# EAGLE board breakout-ledpca9956b (EAGLE 9.3.2)
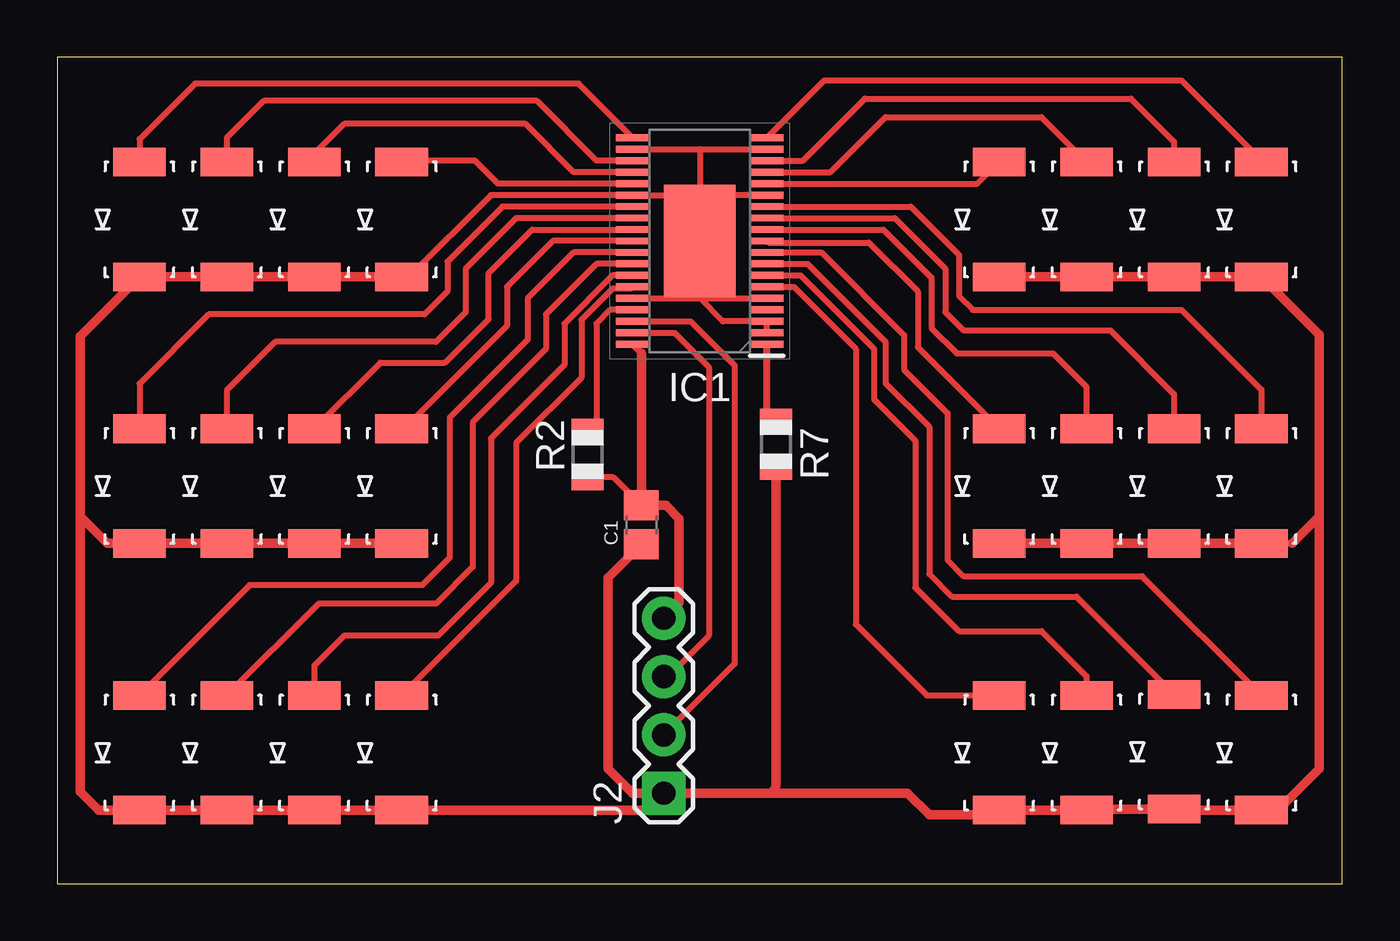
[diagram p0: board, top side]

Size 56 x 36 mm. Coordinates in mm from the lower left corner, seen from the top.
Outline: 0,0 56,0 56,36 0,36 0,0
Copper layers (1*16): Top 0.035mm / dielectric 1.5mm / Bottom 0.035mm
Design rules "OthermillDRC_30_deg_v2": minimum track width 6mil, minimum drill 0.8mm, track to track 6mil, track to pad 6mil, pad to pad 6mil, via to via 6mil, smd to smd 0mil, copper to edge 0mil, drill to drill 6mil, minimum pad ring 10mil, minimum via ring 10mil, stop-mask expansion 1mil, vias tented up to drill 30mil, thermal gap 6mil

## Footprints (pad centres in the part's own frame; a part is rotated, then mirrored left to right if it is on the bottom)
C0805 = smd 1.3 x 1.5: 1 -0.85,0; 2 0.85,0
SOP50P640X110-39N = smd 1.45 x 0.3: 1 -2.925,4.5; 2 -2.925,4; 3 -2.925,3.5; 4 -2.925,3; 5 -2.925,2.5; 6 -2.925,2; 7 -2.925,1.5; 8 -2.925,1; 9 -2.925,0.5; 10 -2.925,0; 11 -2.925,-0.5; 12 -2.925,-1; 13 -2.925,-1.5; 14 -2.925,-2; 15 -2.925,-2.5; 16 -2.925,-3; 17 -2.925,-3.5; 18 -2.925,-4; 19 -2.925,-4.5; 20 2.925,-4.5; 21 2.925,-4; 22 2.925,-3.5; 23 2.925,-3; 24 2.925,-2.5; 25 2.925,-2; 26 2.925,-1.5; 27 2.925,-1; 28 2.925,-0.5; 29 2.925,0; 30 2.925,0.5; 31 2.925,1; 32 2.925,1.5; 33 2.925,2; 34 2.925,2.5; 35 2.925,3; 36 2.925,3.5; 37 2.925,4; 38 2.925,4.5 | smd 3.1 x 4.9: 39 0,0
1X04 = drill 1.016 pad 1.88 square: 1 0,0 | drill 1.016 pad 1.88: 2 2.54,0; 3 5.08,0; 4 7.62,0
GULLWING_LED = smd 1.245 x 2.3: A 5,-1.5; C 0,-1.5
R0805 = smd 1.1 x 1.4: 1 -1,0; 2 1,0

## Placement (x,y rotation side)
C1  0.1 uF  [C0805]  25.46,15.63 90 top
IC1  PCA9956BTWY  [SOP50P640X110-39N]  28,28 180 top
J2  [1X04]  26.43,3.94 90 top
LED1  [GULLWING_LED]  39.55,3.2 90 top
LED2  [GULLWING_LED]  43.36,3.2 90 top
LED3  [GULLWING_LED]  47.17,3.25 90 top
LED4  [GULLWING_LED]  50.98,3.2 90 top
LED5  [GULLWING_LED]  39.55,14.82 90 top
LED6  [GULLWING_LED]  43.36,14.82 90 top
LED7  [GULLWING_LED]  47.17,14.82 90 top
LED8  [GULLWING_LED]  50.98,14.82 90 top
LED9  [GULLWING_LED]  39.55,26.44 90 top
LED10  [GULLWING_LED]  43.36,26.44 90 top
LED11  [GULLWING_LED]  47.17,26.44 90 top
LED12  [GULLWING_LED]  50.98,26.44 90 top
LED13  [GULLWING_LED]  2.08,26.44 90 top
LED14  [GULLWING_LED]  5.89,26.44 90 top
LED15  [GULLWING_LED]  9.7,26.44 90 top
LED16  [GULLWING_LED]  13.51,26.44 90 top
LED17  [GULLWING_LED]  2.08,14.82 90 top
LED18  [GULLWING_LED]  5.89,14.82 90 top
LED19  [GULLWING_LED]  9.7,14.82 90 top
LED20  [GULLWING_LED]  13.51,14.82 90 top
LED21  [GULLWING_LED]  2.08,3.2 90 top
LED22  [GULLWING_LED]  5.89,3.2 90 top
LED23  [GULLWING_LED]  9.7,3.2 90 top
LED24  [GULLWING_LED]  13.51,3.2 90 top
R2  10 K  [R0805]  23.11,18.7 90 top
R7  2 K  [R0805]  31.32,19.14 270 top
U$2  CMD_C0DE_LOGO  [CMD_C0DE_LOGO]  -27.75,3.81 0 top  (outside the outline)

## Library data of the parts
C1 = passives
IC1 = PCA9956BTWY; DESCRIPTION: NXP - PCA9956BTWY - LED DRIVER, CONSTANT CURRENT, HTSSOP-38; HEIGHT: 1.1mm; MANUFACTURER_NAME: NXP; MANUFACTURER_PART_NUMBER: PCA9956BTWY; MOUSER_PART_NUMBER: 771-PCA9956BTWY
J2 = connector; PROD_ID: CONN-09696
LED1-LED24 = leds
R2 R7 = darknet_parts_library
U$2 = logos

## Nets
GND: C1.1 IC1.2 IC1.3 IC1.5 IC1.14 IC1.18 IC1.21 IC1.25 IC1.34 IC1.39 J2.1 LED1.C LED2.C LED3.C LED4.C LED5.C LED6.C LED7.C LED8.C LED9.C LED10.C LED11.C LED12.C LED13.C LED14.C LED15.C LED16.C LED17.C LED18.C LED19.C LED20.C LED21.C LED22.C LED23.C LED24.C R7.2
N$1: IC1.6 LED1.A
N$2: IC1.7 LED2.A
N$3: IC1.8 LED3.A
N$4: IC1.9 LED4.A
N$5: IC1.10 LED5.A
N$6: IC1.11 LED6.A
N$7: IC1.12 LED7.A
N$8: IC1.13 LED8.A
N$9: IC1.15 LED9.A
N$10: IC1.16 LED10.A
N$11: IC1.17 LED11.A
N$12: IC1.19 LED12.A
N$13: IC1.20 LED13.A
N$14: IC1.22 LED14.A
N$15: IC1.23 LED15.A
N$16: IC1.24 LED16.A
N$17: IC1.26 LED17.A
N$18: IC1.27 LED18.A
N$19: IC1.28 LED19.A
N$20: IC1.29 LED20.A
N$21: IC1.30 LED21.A
N$22: IC1.31 LED22.A
N$23: IC1.32 LED23.A
N$24: IC1.33 LED24.A
N$35: IC1.1 R7.1
N$36: IC1.35 R2.2
SCL: IC1.36 J2.2
SDA: IC1.37 J2.3
VCC: C1.2 IC1.38 J2.4 R2.1

## Tracks (layer width: path | path; a pad name or v marks a point on that pad's centre or on a via)
GND
  Top 0.254: IC1.21 28,32 | 28,32 IC1.18 | 28,32 28,30 | 28,30 IC1.39 28,25.5 | 28,30 IC1.25 18.9,30 15.34,26.44 LED16.C | IC1.14 28,30 | IC1.34 28,25.5 | 28,25.5 IC1.5 | IC1.2 IC1.3 29,24.5 28,25.5 | 53.82,14.82 LED8.C | 53.2,3.2 LED4.C | 48.72,3.2 LED3.C | 44.91,3.25 LED2.C | 40.85,3 LED1.C | 31.32,4.26 31,3.94
  Top 0.406: LED16.C LED15.C LED14.C LED13.C 1,23.86 1,16 | 1,16 2.18,14.82 LED17.C LED18.C LED19.C LED20.C | 1,16 1,4 1.8,3.2 LED21.C LED22.C LED23.C LED24.C 25.69,3.2 J2.1 | C1.1 24,13.32 24,5 25.06,3.94 J2.1 | LED9.C LED10.C LED11.C LED12.C 55,23.92 55,16 | 55,16 53.82,14.82 | LED8.C LED7.C LED6.C LED5.C | 55,16 55,5 53.2,3.2 | LED4.C 48.72,3.2 | LED3.C 44.91,3.25 | LED2.C LED1.C | J2.1 31,3.94 37.06,3.94 38,3 40.85,3 | R7.2 31.32,4.26
N$1
  Top 0.254: IC1.6 32.1,26 34.8,23.3 34.8,11.3 37.9,8.2 LED1.A
N$2
  Top 0.254: IC1.7 32.4,26.5 35.6,23.3 35.6,21.1 37.4,19.3 37.4,12.9 39.3,11 42.9,11 44.86,9.04 LED2.A
N$3
  Top 0.254: IC1.8 32.7,27 36.1,23.6 36.1,21.8 38,19.9 38,13.5 39,12.5 44.42,12.5 LED3.A
N$4
  Top 0.254: IC1.9 33.3,27.5 36.9,23.9 36.9,22.4 38.8,20.5 38.8,14.1 39.5,13.4 47.28,13.4 LED4.A
N$5
  Top 0.254: IC1.10 31,27.93 35.37,27.93 37.5,25.8 37.5,23.37 LED5.A
N$6
  Top 0.254: IC1.11 36,28.5 38.1,26.4 38.1,24.2 39.2,23.1 43.4,23.1 44.86,21.64 LED6.A
N$7
  Top 0.254: IC1.12 36.5,29 38.7,26.8 38.7,24.9 39.5,24.1 45.9,24.1 48.67,21.33 LED7.A
N$8
  Top 0.254: IC1.13 37.2,29.5 39.3,27.4 39.3,25.6 39.9,25 49,25 52.48,21.52 LED8.A
N$9
  Top 0.254: IC1.15 40.11,30.5 LED9.A
N$10
  Top 0.254: IC1.16 33.7,31 36.1,33.4 42.9,33.4 LED10.A
N$11
  Top 0.254: IC1.17 32.5,31.5 35.2,34.2 46.8,34.2 48.67,32.33 LED11.A
N$12
  Top 0.254: IC1.19 33.42,35 49,35 52.48,31.52 LED12.A
N$13
  Top 0.254: IC1.20 22.72,34.86 6,34.86 3.58,32.44 LED13.A
N$14
  Top 0.254: IC1.22 23.5,31.5 20.9,34.1 9,34.1 7.39,32.49 LED14.A
N$15
  Top 0.254: LED15.A 11.2,31.8 12.5,33.1 20.4,33.1 22.5,31 IC1.23
N$16
  Top 0.254: IC1.24 19.2,30.5 18.2,31.5 15.07,31.5 LED16.A
N$17
  Top 0.254: IC1.26 19.4,29.5 17,27.1 17,25.8 16,24.8 6.6,24.8 3.58,21.78 LED17.A
N$18
  Top 0.254: IC1.27 20,29 17.8,26.8 17.8,24.9 16.5,23.6 9.5,23.6 7.39,21.49 LED18.A
N$19
  Top 0.254: LED19.A 14.08,22.7 16.9,22.7 18.8,24.6 18.8,26.6 20.7,28.5 IC1.28
N$20
  Top 0.254: IC1.29 21.6,28 19.6,26 19.6,24.3 15.12,19.82 LED20.A
N$21
  Top 0.254: IC1.30 22.5,27.5 20.5,25.5 20.5,23.7 17.1,20.3 17.1,14.2 15.9,13 8.38,13 LED21.A
N$22
  Top 0.254: IC1.31 23.5,27 21.3,24.8 21.3,23.3 18.1,20.1 18.1,13.8 16.5,12.2 11.39,12.2 LED22.A
N$23
  Top 0.254: IC1.32 24.2,26.5 22.1,24.4 22.1,22.6 18.9,19.4 18.9,13.1 16.6,10.8 12.5,10.8 11.2,9.5 LED23.A
N$24
  Top 0.254: IC1.33 25,25.93 24.2,25.93 22.84,24.56 22.84,22.04 20,19.2 20,13.19 LED24.A
N$35
  Top 0.254: R7.1 30.93,20.54
  Top 0.305: 30.93,20.54 IC1.1
N$36
  Top 0.254: IC1.35 24.1,25 23.5,24.4 23.5,20.09 R2.2
SCL
  Top 0.254: IC1.36 27.6,24.5 29.52,22.58 29.52,9.57 J2.2
SDA
  Top 0.254: IC1.37 26.9,24 27.95,22.95 28.3,22.6 28.4,22.5 28.4,10.8 26.62,9.02 J2.3
VCC
  Top 0.254: C1.2 24.24,17.7 R2.1
  Top 0.305: 25.46,23.11 IC1.38
  Top 0.406: J2.4 27.1,12.23 27.1,15.9 26.52,16.48 C1.2 25.46,23.11